# EAGLE board official (EAGLE 6.3)
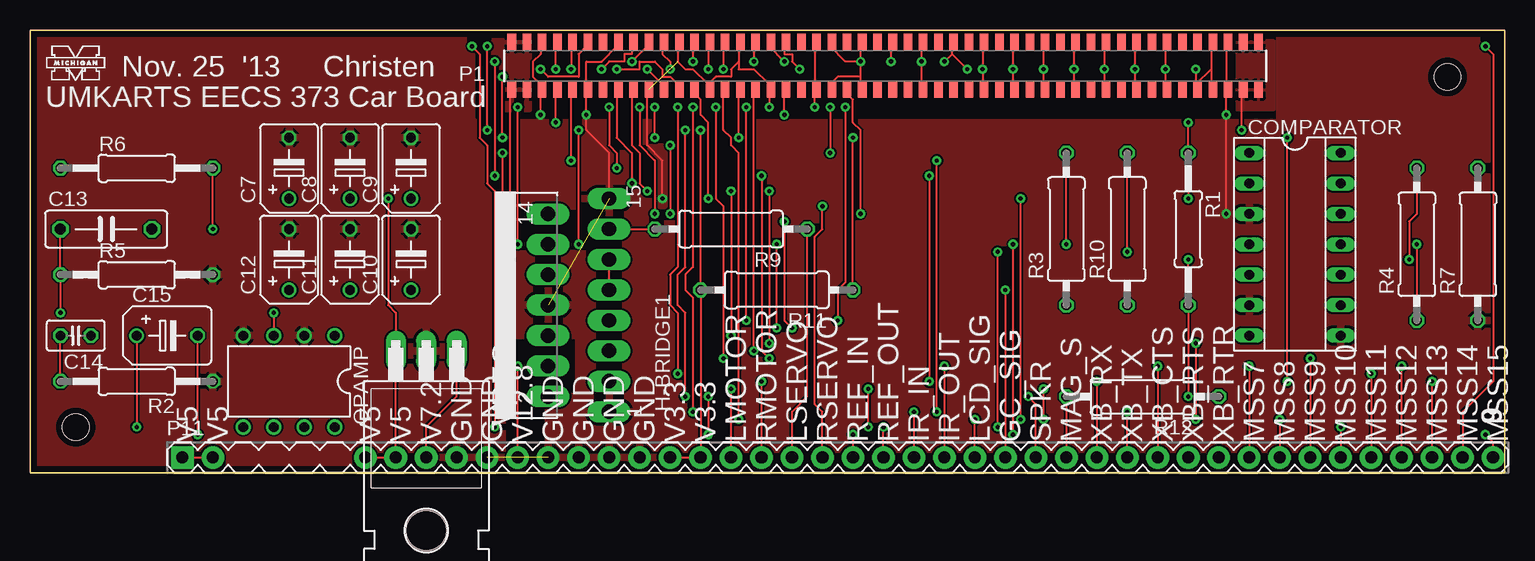
[diagram p0: board, top side]
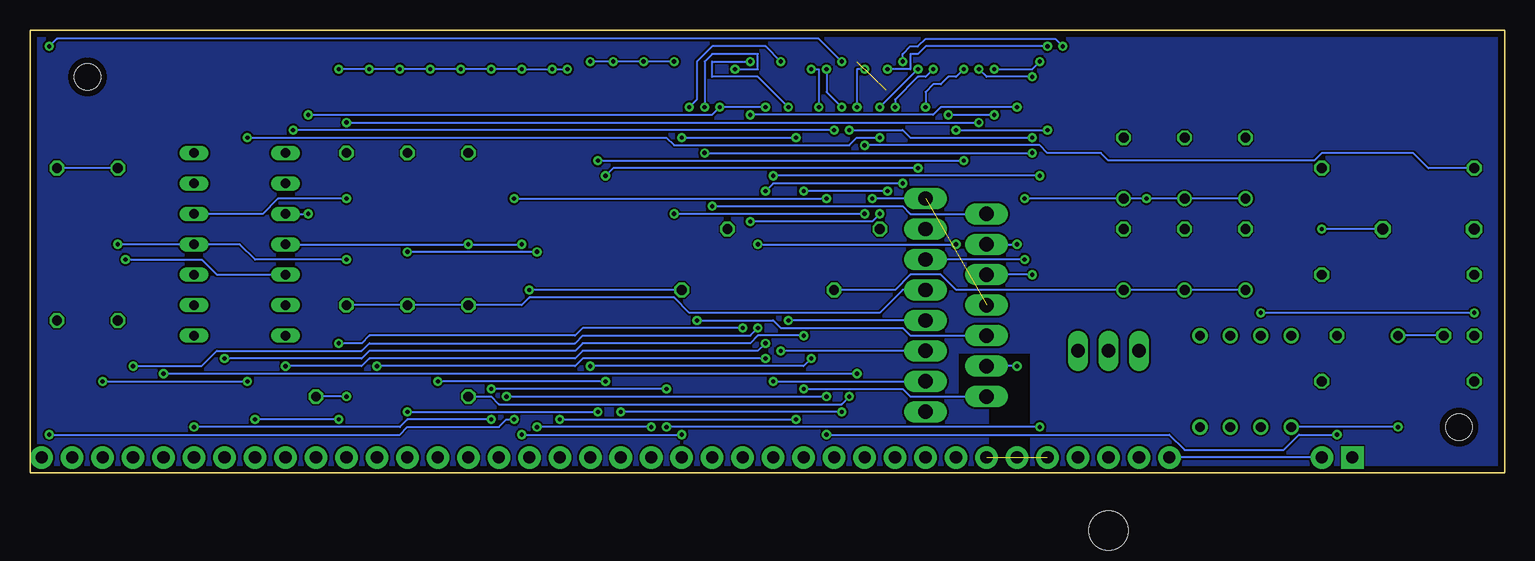
[diagram p1: board, bottom side, seen from below]

Size 122.89 x 36.93 mm. Coordinates in mm from the lower left corner, seen from the top.
Outline: 0,0 122.89,0 122.89,36.93 0,36.93 0,0
Copper layers (1*16): Top 0.0178mm / dielectric 59mil / Bottom 0.0178mm
Design rules "SSC-EAGLE-2Lyr_v1.0.0.3 *": minimum track width 6mil, minimum drill 14mil, track to track 6mil, track to pad 6mil, pad to pad 6mil, via to via 6mil, smd to smd 6mil, copper to edge 20mil, drill to drill 16mil, minimum pad ring 8mil, minimum via ring 8mil, stop-mask expansion 3mil, vias tented up to drill 16mil, thermal gap 10mil
Holes 2.2 mm at 3.81,3.81 118.11,33.02

## Footprints (pad centres in the part's own frame; a part is rotated, then mirrored left to right if it is on the bottom)
B45181B = drill 0.813: + -2.54,0 | drill 0.813 octagon: - 2.54,0
C075-032X103 = drill 0.914 octagon: 1 -3.81,0; 2 3.81,0
C025-025X050 = drill 0.813 octagon: 1 -1.27,0; 2 1.27,0
SOCKET-14 = drill 0.813 long: 1 -7.62,-3.81; 2 -5.08,-3.81; 3 -2.54,-3.81; 4 0,-3.81; 5 2.54,-3.81; 6 5.08,-3.81; 7 7.62,-3.81; 8 7.62,3.81; 9 5.08,3.81; 10 2.54,3.81; 11 0,3.81; 12 -2.54,3.81; 13 -5.08,3.81; 14 -7.62,3.81
MULTIWATT-15 = drill 1.2 long: 1 -8.89,-7.62; 2 -7.62,-2.54; 3 -6.35,-7.62; 4 -5.08,-2.54; 5 -3.81,-7.62; 6 -2.54,-2.54; 7 -1.27,-7.62; 8 0,-2.54; 9 1.27,-7.62; 10 2.54,-2.54; 11 3.81,-7.62; 12 5.08,-2.54; 13 6.35,-7.62; 14 7.62,-2.54; 15 8.89,-7.62
DIL08 = drill 0.813 pad 1.27: 1 -3.81,-3.81; 2 -1.27,-3.81; 3 1.27,-3.81; 4 3.81,-3.81; 5 3.81,3.81; 6 1.27,3.81; 7 -1.27,3.81; 8 -3.81,3.81
CLP-150 = smd 0.711 x 1.35: P$1 -31.115,1.99; P$2 -31.115,-1.99; P$3 -29.845,1.99; P$4 -29.845,-1.99; P$5 -28.575,1.99; P$6 -28.575,-1.99; P$7 -27.305,1.99; P$8 -27.305,-1.99; P$9 -26.035,1.99; P$10 -26.035,-1.99; P$11 -24.765,1.99; P$12 -24.765,-1.99; P$13 -23.495,1.99; P$14 -23.495,-1.99; P$15 -22.225,1.99; P$16 -22.225,-1.99; P$17 -20.955,1.99; P$18 -20.955,-1.99; P$19 -19.685,1.99; P$20 -19.685,-1.99; P$21 -18.415,1.99; P$22 -18.415,-1.99; P$23 -17.145,1.99; P$24 -17.145,-1.99; P$25 -15.875,1.99; P$26 -15.875,-1.99; P$27 -14.605,1.99; P$28 -14.605,-1.99; P$29 -13.335,1.99; P$30 -13.335,-1.99; P$31 -12.065,1.99; P$32 -12.065,-1.99; P$33 -10.795,1.99; P$34 -10.795,-1.99; P$35 -9.525,1.99; P$36 -9.525,-1.99; P$37 -8.255,1.99; P$38 -8.255,-1.99; P$39 -6.985,1.99; P$40 -6.985,-1.99; P$41 -5.715,1.99; P$42 -5.715,-1.99; P$43 -4.445,1.99; P$44 -4.445,-1.99; P$45 -3.175,1.99; P$46 -3.175,-1.99; P$47 -1.905,1.99; P$48 -1.905,-1.99; P$49 -0.635,1.99; P$50 -0.635,-1.99; P$51 0.635,1.99; P$52 0.635,-1.99; P$53 1.905,1.99; P$54 1.905,-1.99; P$55 3.175,1.99; P$56 3.175,-1.99; P$57 4.445,1.99; P$58 4.445,-1.99; P$59 5.715,1.99; P$60 5.715,-1.99; P$61 6.985,1.99; P$62 6.985,-1.99; P$63 8.255,1.99; P$64 8.255,-1.99; P$65 9.525,1.99; P$66 9.525,-1.99; P$67 10.795,1.99; P$68 10.795,-1.99; P$69 12.065,1.99; P$70 12.065,-1.99; P$71 13.335,1.99; P$72 13.335,-1.99; P$73 14.605,1.99; P$74 14.605,-1.99; P$75 15.875,1.99; P$76 15.875,-1.99; P$77 17.145,1.99; P$78 17.145,-1.99; P$79 18.415,1.99; P$80 18.415,-1.99; P$81 19.685,1.99; P$82 19.685,-1.99; P$83 20.955,1.99; P$84 20.955,-1.99; P$85 22.225,1.99; P$86 22.225,-1.99; P$87 23.495,1.99; P$88 23.495,-1.99; P$89 24.765,1.99; P$90 24.765,-1.99; P$91 26.035,1.99; P$92 26.035,-1.99; P$93 27.305,1.99; P$94 27.305,-1.99; P$95 28.575,1.99; P$96 28.575,-1.99; P$97 29.845,1.99; P$98 29.845,-1.99; P$99 31.115,1.99; P$100 31.115,-1.99
1X40 = drill 1.016 pad 1.88 square: 1 -54.61,0 | drill 1.016 pad 1.88: 2 -52.07,0; 3 -39.37,0; 4 -36.83,0; 5 -34.29,0; 6 -31.75,0; 7 -29.21,0; 8 -26.67,0; 9 -24.13,0; 10 -21.59,0; 11 -19.05,0; 12 -16.51,0; 13 -13.97,0; 14 -11.43,0; 15 -8.89,0; 16 -6.35,0; 17 -3.81,0; 18 -1.27,0; 19 1.27,0; 20 3.81,0; 21 6.35,0; 22 8.89,0; 23 11.43,0; 24 13.97,0; 25 16.51,0; 26 19.05,0; 27 21.59,0; 28 24.13,0; 29 26.67,0; 30 29.21,0; 31 31.75,0; 32 34.29,0; 33 36.83,0; 34 39.37,0; 35 41.91,0; 36 44.45,0; 37 46.99,0; 38 49.53,0; 39 52.07,0; 40 54.61,0
0207/12 = drill 0.813 octagon: 1 -6.35,0; 2 6.35,0
0309/12 = drill 0.813 octagon: 1 -6.35,0; 2 6.35,0
TO220H = drill 1.118 long: 1 -2.54,-10.16; 2 0,-10.16; 3 2.54,-10.16 | hole 3.302: 0,4.826

## Placement (x,y rotation side)
C7  [B45181B]  21.59,25.4 90 top
C8  [B45181B]  26.67,25.4 90 top
C9  [B45181B]  31.75,25.4 90 top
C10  [B45181B]  31.75,17.78 90 top
C11  [B45181B]  26.67,17.78 90 top
C12  [B45181B]  21.59,17.78 90 top
C13  [C075-032X103]  6.35,20.32 0 top
C14  [C025-025X050]  3.81,11.43 180 top
C15  [B45181B]  11.43,11.43 0 top
COMPARATOR  [SOCKET-14]  105.41,19.05 270 top
H-BRIDGE1  L298  [MULTIWATT-15]  40.64,13.97 90 top
OPAMP  LM386N-4  [DIL08]  21.59,7.62 180 top
P1  DEV_CLP-150  [CLP-150]  71.26,33.93 0 top
P11  DEV_1X40  [1X40]  67.31,1.27 0 top
R1  2.2K  [0207/12]  96.52,20.32 270 top
R2  [0207/12]  8.89,7.62 180 top
R3  10k  [0309/12]  86.36,20.32 90 top
R4  10K  [0309/12]  115.57,19.05 90 top
R5  [0207/12]  8.89,16.51 0 top
R6  [0207/12]  8.89,25.4 0 top
R7  2.2k  [0309/12]  120.65,19.05 90 top
R9  10  [0309/12]  58.42,20.32 180 top
R10  200  [0309/12]  91.44,20.32 90 top
R11  10k  [0309/12]  62.23,15.24 180 top
R12  750  [0309/12]  92.71,6.35 180 top
U$1  [UMICH]  1.27,32.51 0 top
VREG  7806T  [TO220H]  33.02,0 180 top

## Library data of the parts
C7-C15 R1-R7 R9-R12 = rcl
COMPARATOR = ic-package
H-BRIDGE1 = st-microelectronics; MPN: L298N; OC_FARNELL: 1589425; OC_NEWARK: 32M1527
OPAMP VREG = linear
P1 P11 = EECS370
U$1 = umich

## Nets
7.2V: P11.5 VREG.1
12.8V: H-BRIDGE1.4 P11.8
AC1: P1.P$91
AC2: P1.P$49
AC3: P1.P$53
AC4: P1.P$57
ADC0: P1.P$77
ADC1: P1.P$78
ADC4: P1.P$73
ADC5: P1.P$74
ADC6: P1.P$81
ADC7: P1.P$82
ADC8: P1.P$85
ADC9: P1.P$86
ADC10: P1.P$89
ADC11: P1.P$90
AGND: P1.P$43 P1.P$44 P1.P$47 P1.P$48 P1.P$51 P1.P$55 P1.P$56 P1.P$59 P1.P$63 P1.P$64 P1.P$67 P1.P$68 P1.P$71 P1.P$72 P1.P$75 P1.P$76 P1.P$79 P1.P$80 P1.P$83 P1.P$84 P1.P$87 P1.P$88 P1.P$92 P1.P$93 P1.P$94
AT2: P1.P$50
AT3: P1.P$54
AT4: P1.P$58
ATGND1: P1.P$52
ATGND2: P1.P$60
AV1_1: P1.P$61
AV1_3: P1.P$65
AV1_4: P1.P$70
AV2_1: P1.P$62
AV2_3: P1.P$66
AV2_4: P1.P$69
DACOUT0: P1.P$45
DACOUT1: P1.P$46 R6.1
DGND: C7.- C8.- C9.- C10.- C11.- C12.- COMPARATOR.3 COMPARATOR.6 COMPARATOR.8 H-BRIDGE1.1 H-BRIDGE1.8 H-BRIDGE1.15 OPAMP.2 OPAMP.4 P1.P$5 P1.P$6 P1.P$12 P1.P$15 P1.P$20 P1.P$23 P1.P$28 P1.P$31 P1.P$36 P1.P$41 P1.P$42 P1.P$95 P1.P$96 P11.6 P11.7 P11.9 P11.10 P11.11 P11.12 R2.1 R5.2 R7.1 VREG.2
F2-200-IO_0: P1.P$27 P11.21
F2-200-IO_1: P1.P$29 P11.22
F2-200-IO_2: P1.P$30 P11.23
F2-200-IO_3: P1.P$32 P11.24 R11.1
F2-200-IO_4: H-BRIDGE1.6 P1.P$33
F2-200-IO_5: H-BRIDGE1.5 P1.P$34
F2-200-IO_6: H-BRIDGE1.7 P1.P$35
F2-200-IO_7: H-BRIDGE1.10 P1.P$37
F2-200-IO_8: H-BRIDGE1.12 P1.P$38
LMOTOR: H-BRIDGE1.2 P11.15
LSERVO: P11.17 R9.1
MSS_GP_IO_0: P1.P$7 P11.26 R12.2
MSS_GP_IO_1: COMPARATOR.12 P1.P$8 R1.1
MSS_GP_IO_2: P1.P$9 P11.27
MSS_GP_IO_3: P1.P$10 P11.28
MSS_GP_IO_4: P1.P$11 P11.29
MSS_GP_IO_5: P1.P$13
MSS_GP_IO_6: P1.P$14
MSS_GP_IO_7: P1.P$16 P11.32
MSS_GP_IO_8: P1.P$17 P11.33
MSS_GP_IO_9: P1.P$18 P11.34
MSS_GP_IO_10: P1.P$19 P11.35
MSS_GP_IO_11: P1.P$21 P11.36
MSS_GP_IO_12: P1.P$22 P11.37
MSS_GP_IO_13: P1.P$24 P11.38
MSS_GP_IO_14: P1.P$25 P11.39
MSS_GP_IO_15: P1.P$26 P11.40
MSS_GPIO_5: P11.30
MSS_GPIO_6: P11.31
N$1: H-BRIDGE1.13 R9.2
N$2: C13.1 OPAMP.3 R5.1
N$3: COMPARATOR.5 R4.2 R7.2
N$4: C14.2 R2.2
N$5: C14.1 C15.+ OPAMP.5
N$6: OPAMP.6
N$9: C13.2 R6.2
PWM0: P1.P$39
PWM1: P1.P$40
REFS_IN: COMPARATOR.4 P11.19 R3.2
REFS_OUT: P11.20 R10.2
RMOTOR: H-BRIDGE1.3 P11.16
RSERVO: H-BRIDGE1.14 P11.18
SPKR: C15.- P11.25
VDD3.3: C10.+ C11.+ C12.+ P1.P$97 P1.P$98 P1.P$99 P1.P$100 P11.13 P11.14 R11.2
VDD5: C7.+ C8.+ C9.+ COMPARATOR.11 H-BRIDGE1.9 H-BRIDGE1.11 P1.P$1 P1.P$2 P1.P$3 P1.P$4 P11.1 P11.2 P11.3 P11.4 R1.2 R3.1 R4.1 R10.1 R12.1 VREG.3

## Tracks (layer width: path | path; a pad name or v marks a point on that pad's centre or on a via)
7.2V
  Top 0.152: VREG.1 35.56,6.35 33.02,3.81 P11.5
12.8V  (via drill 0.36)
  Top 0.152: P11.8 v40.64,8.89
  Bottom 0.152: v40.64,8.89 H-BRIDGE1.4
AGND  (via drill 0.36)
  Top 0.152: P1.P$55 74.3,35.56 v74.3,34.29 74.3,32.38 P1.P$56 | 69.22,33.02 67.31,33.02 66.67,32.38 P1.P$44 | 69.22,33.02 69.22,32.38 P1.P$48 | v69.22,34.29 67.94,34.29 66.67,35.56 P1.P$43 | 69.22,33.02 v69.22,34.29 | v69.22,34.29 69.22,35.56 P1.P$47 | v71.75,34.29 71.75,35.56 P1.P$51 | 76.83,34.92 76.83,35.56 P1.P$59 | v76.2,34.29 76.83,34.92 | 98.42,33.66 97.16,32.38 | 98.42,33.66 98.42,35.56 P1.P$93 | 98.42,33.66 98.42,32.38 P1.P$94 | P1.P$88 94.61,32.38 v94.61,33.66 94.61,35.56 P1.P$87 | P1.P$84 92.08,32.38 v92.08,33.66 92.08,35.56 P1.P$83 | P1.P$80 89.53,32.38 v89.53,33.66 89.53,35.56 P1.P$79 | P1.P$76 87,32.38 v87,33.66 87,35.56 P1.P$75 | P1.P$72 84.45,32.38 v84.45,33.66 84.45,35.56 P1.P$71 | P1.P$64 79.38,32.38 v79.38,33.66 79.38,35.56 P1.P$63 | P1.P$68 81.92,32.38 v81.92,33.66 81.92,35.56 P1.P$67 | v97.16,33.66 97.16,32.38 | 97.16,32.38 P1.P$92 | v78.11,33.66 76.83,34.92
  Bottom 0.152: v69.22,34.29 v71.75,34.29 v74.3,34.29 v76.2,34.29 | v97.16,33.66 v94.61,33.66 v92.08,33.66 v89.53,33.66 v87,33.66 v84.45,33.66 v81.92,33.66 v79.38,33.66 v78.11,33.66
D$8
  pour Bottom: 0,36.83 123.19,36.83 123.19,0 45.72,0 43.18,0 43.18,6.35 45.72,6.35 45.72,10.16 39.37,10.16 39.37,0 0,0
DACOUT1  (via drill 0.36)
  Top 0.152: v69.22,21.59 69.22,28.57 68.58,29.21 68.58,31.11 67.94,31.75 P1.P$46 | v53.34,27.3 v53.34,21.59
  Bottom 0.152: v53.34,21.59 v69.22,21.59 | v53.34,27.3 38.73,27.3 38.1,26.67 33.66,26.67 33.02,26.04 15.88,26.04 15.24,26.67 7.62,26.67 6.35,25.4 R6.1
DGND  (via drill 0.36)  (3 unrouted)
  Top 0.152: 56.52,32.38 55.24,33.66 54.61,33.66 53.98,34.29 53.98,35.56 P1.P$23 | P1.P$41 65.41,35.56 65.41,32.38 P1.P$42 65.41,31.75 v65.41,30.48 | 59.05,34.29 59.05,35.56 P1.P$31 | 59.05,34.29 59.05,33.66 60.33,33.66 61.59,32.38 P1.P$36 61.59,31.75 v61.59,30.48 | 56.52,32.38 57.15,33.02 58.42,33.02 58.42,33.66 59.05,34.29 | 56.52,32.38 P1.P$28 | P1.P$95 99.69,35.56 99.69,32.38 P1.P$96 99.69,31.75 v99.69,29.84 v99.69,21.59 | P1.P$5 42.55,35.56 42.55,34.92 41.91,34.29 41.91,33.02 42.55,32.38 P1.P$6 42.55,31.75 v42.55,29.84 | H-BRIDGE1.15 48.26,26.67 46.35,28.57 v46.35,29.84 46.35,31.75 P1.P$12 46.35,32.38 46.35,34.29 47.62,34.29 48.9,35.56 P1.P$15 | v52.7,22.86 52.7,26.04 51.44,27.3 51.44,31.75 P1.P$20
  Bottom 0.152: v61.59,30.48 v65.41,30.48 66.04,29.84 v99.69,29.84 | H-BRIDGE1.15 v52.7,22.86 | v46.35,29.84 v42.55,29.84 | COMPARATOR.3 v99.69,21.59
  pour Top: 36.83,36.83 0,36.83 0,0 39.37,0 39.37,11.43 45.72,11.43 45.72,6.35 43.18,6.35 43.18,0 45.72,0 123.19,0 123.19,36.83 104.14,36.83 104.14,29.21 36.83,29.21
F2-200-IO_0  (via drill 0.36)
  Top 0.152: v73.66,5.08 P11.21 | v55.24,5.08 55.24,14.61 54.61,15.24 54.61,16.51 55.24,17.14 v55.24,30.48 | v56.52,33.66 56.52,35.56 P1.P$27
  Bottom 0.152: v55.24,5.08 v73.66,5.08 | v55.24,30.48 56.52,31.75 v56.52,33.66
F2-200-IO_1  (via drill 0.36)
  Top 0.152: v76.2,8.89 P11.22 | v57.78,9.53 57.78,22.23 57.15,22.86 v57.15,30.48 | v57.78,33.66 57.78,35.56 P1.P$29
  Bottom 0.152: v76.2,8.89 58.42,8.89 v57.78,9.53 | v57.15,30.48 57.15,33.66 v57.78,33.66
F2-200-IO_2  (via drill 0.36)
  Top 0.152: v59.05,4.45 59.05,26.67 58.42,27.3 58.42,27.94 57.78,28.57 57.78,31.75 P1.P$30 | P11.23 v78.74,4.45
  Bottom 0.152: v78.74,4.45 v59.05,4.45
F2-200-IO_3  (via drill 0.36)
  Top 0.152: v59.05,27.94 59.05,31.75 P1.P$32 | R11.1 v68.58,27.94 | v81.28,15.24 P11.24
  Bottom 0.152: v68.58,27.94 v59.05,27.94 | R11.1 v81.28,15.24
F2-200-IO_4  (via drill 0.36)
  Top 0.152: v67.31,12.7 67.31,15.24 67.94,15.88 v67.94,30.48 | v60.33,34.29 60.33,35.56 P1.P$33
  Bottom 0.152: H-BRIDGE1.6 49.53,11.43 50.16,12.06 60.33,12.06 60.96,12.7 v67.31,12.7 | v67.94,30.48 67.31,31.11 67.31,34.29 66.04,35.56 61.59,35.56 v60.33,34.29
F2-200-IO_5  (via drill 0.36)
  Top 0.152: v60.33,10.16 60.33,31.75 P1.P$34
  Bottom 0.152: H-BRIDGE1.5 v60.33,10.16
F2-200-IO_6  (via drill 0.36)
  Top 0.152: v62.87,34.29 61.59,35.56 P1.P$35 | v59.69,12.7 v59.69,30.48
  Bottom 0.152: v62.87,34.29 66.04,34.29 66.04,33.02 62.23,33.02 v59.69,30.48 | H-BRIDGE1.7 v59.69,12.7
F2-200-IO_7  (via drill 0.36)
  Top 0.152: v39.37,26.67 v39.37,16.51 | v66.67,30.48 v66.67,26.67 | v64.14,33.66 63.5,34.29 63.5,34.92 62.87,34.92 62.87,35.56 P1.P$37
  Bottom 0.152: v39.37,16.51 H-BRIDGE1.10 | v66.67,26.67 v39.37,26.67 | v66.67,30.48 66.67,34.29 66.04,34.92 62.23,34.92 62.23,33.66 v64.14,33.66
F2-200-IO_8  (via drill 0.36)
  Top 0.152: v62.87,29.84 62.87,31.75 P1.P$38 | v40.64,19.05 v40.64,30.48
  Bottom 0.152: v62.87,29.84 47.62,29.84 46.99,30.48 v40.64,30.48 | H-BRIDGE1.12 v40.64,19.05
LMOTOR  (via drill 0.36)
  Top 0.152: P11.15 v58.42,6.99
  Bottom 0.152: H-BRIDGE1.2 49.53,6.35 50.16,6.99 v58.42,6.99
LSERVO
  Top 0.152: R9.1 64.77,6.35 63.5,5.08 P11.17
MSS_GP_IO_0  (via drill 0.36)
  Top 0.152: R12.2 P11.26 | v43.81,33.66 43.81,35.56 P1.P$7 | v39.37,27.94 v39.37,33.02 | v54.61,28.57 54.61,17.14 53.98,16.51 53.98,13.97 54.61,13.34 v54.61,6.35
  Bottom 0.152: v43.81,33.66 43.18,33.02 v39.37,33.02 | v39.37,27.94 49.53,27.94 50.16,28.57 v54.61,28.57 | v54.61,6.35 55.24,5.71 83.82,5.71 84.45,6.35 R12.2
MSS_GP_IO_1  (via drill 0.36)
  Top 0.152: v43.81,29.21 43.81,31.75 P1.P$8 | v96.52,29.21 R1.1 v96.52,22.86
  Bottom 0.152: v96.52,29.21 v43.81,29.21 | COMPARATOR.12 103.5,21.59 102.23,22.86 v96.52,22.86
MSS_GP_IO_2  (via drill 0.36)
  Top 0.152: v88.9,7.62 P11.27 | v74.93,24.77 v74.93,7.62 | v48.9,25.4 48.9,26.67 48.26,27.3 v48.26,30.48 | v45.09,33.66 45.09,35.56 P1.P$9
  Bottom 0.152: v74.93,7.62 v88.9,7.62 | v74.93,24.77 74.3,25.4 v48.9,25.4 | v48.26,30.48 48.26,31.75 47.62,32.38 46.99,32.38 46.35,33.02 45.72,33.02 v45.09,33.66
MSS_GP_IO_3  (via drill 0.36)
  Top 0.152: v45.09,26.04 45.09,31.75 P1.P$10 | v75.56,5.08 v75.56,26.04 | P11.28 v91.44,5.08
  Bottom 0.152: v75.56,26.04 v45.09,26.04 | v91.44,5.08 v75.56,5.08
MSS_GP_IO_4  (via drill 0.36)
  Top 0.152: v93.98,8.89 P11.29 | v61.59,9.53 60.96,10.16 v60.96,24.77 | v38.73,34.29 v38.73,24.77 | v42.55,33.66 43.18,33.02 45.72,33.02 45.72,34.92 46.35,35.56 P1.P$11
  Bottom 0.152: v93.98,8.89 77.47,8.89 76.83,9.53 v61.59,9.53 | v38.73,24.77 v60.96,24.77 | v38.73,34.29 39.37,33.66 v42.55,33.66
MSS_GP_IO_7  (via drill 0.36)
  Top 0.152: v101.6,8.89 P11.32 | v61.59,23.5 v61.59,10.79 | v50.16,24.13 50.16,26.67 48.9,27.94 48.9,31.75 P1.P$16
  Bottom 0.152: v101.6,8.89 95.25,8.89 94.61,9.53 77.47,9.53 76.83,10.16 62.23,10.16 v61.59,10.79 | v61.59,23.5 60.96,24.13 v50.16,24.13
MSS_GP_IO_8  (via drill 0.36)
  Top 0.152: v104.14,4.45 P11.33 | v97.16,10.79 v97.16,4.45 | v63.5,12.06 62.87,12.7 v62.87,20.95 | v52.07,21.59 52.07,26.04 50.8,27.3 v50.8,30.48 | v47.62,33.66 48.26,34.29 49.53,34.29 49.53,34.92 50.16,34.92 50.16,35.56 P1.P$17
  Bottom 0.152: v97.16,4.45 v104.14,4.45 | v97.16,10.79 95.25,10.79 94.61,11.43 77.47,11.43 76.83,12.06 v63.5,12.06 | v62.87,20.95 52.7,20.95 v52.07,21.59 | v50.8,30.48 50.8,31.11 48.9,33.02 48.26,33.02 v47.62,33.66
MSS_GP_IO_9  (via drill 0.36)
  Top 0.152: v106.68,9.53 P11.34 | v58.42,23.5 v58.42,11.43 | v51.44,23.5 50.8,24.13 50.8,26.67 50.16,27.3 50.16,31.75 P1.P$18
  Bottom 0.152: v106.68,9.53 95.25,9.53 94.61,10.16 77.47,10.16 76.83,10.79 62.87,10.79 62.23,11.43 v58.42,11.43 | v51.44,23.5 v58.42,23.5
MSS_GP_IO_10  (via drill 0.36)
  Top 0.152: v109.22,3.81 P11.35 | v84.45,6.99 v84.45,4.45 | v69.85,3.81 v69.85,6.99 | v38.73,3.81 38.73,23.5 38.1,24.13 38.1,27.3 37.47,27.94 37.47,34.92 v36.83,35.56 | v50.16,34.29 51.44,35.56 P1.P$19
  Bottom 0.152: v109.22,3.81 92.08,3.81 91.44,4.45 v84.45,4.45 | v69.85,6.99 v84.45,6.99 | v38.73,3.81 v69.85,3.81 | v36.83,35.56 37.47,36.2 48.26,36.2 48.9,35.56 49.53,35.56 50.16,34.92 v50.16,34.29
MSS_GP_IO_11  (via drill 0.36)
  Top 0.152: v111.76,8.26 P11.36 | v53.98,8.26 53.98,13.34 53.34,13.97 53.34,16.51 53.98,17.14 v53.98,30.48 | v53.34,33.66 53.34,34.29 52.7,34.92 52.7,35.56 P1.P$21
  Bottom 0.152: v53.98,8.26 v111.76,8.26 | v53.98,30.48 53.98,33.66 v53.34,33.66
MSS_GP_IO_12  (via drill 0.36)
  Top 0.152: v51.44,33.66 52.7,32.38 P1.P$22 | v38.1,28.57 v38.1,35.56 | v45.72,19.05 v45.72,28.57 | v62.23,12.06 v62.23,19.05 | P11.37 v114.3,8.89
  Bottom 0.152: v51.44,33.66 49.53,33.66 49.53,34.92 48.9,34.92 48.26,35.56 v38.1,35.56 | v45.72,28.57 v38.1,28.57 | v62.23,19.05 v45.72,19.05 | v62.23,12.06 62.87,11.43 76.83,11.43 77.47,10.79 94.61,10.79 95.25,10.16 107.31,10.16 108.58,8.89 v114.3,8.89
MSS_GP_IO_13  (via drill 0.36)
  Top 0.152: v48.9,33.66 50.8,33.66 50.8,34.29 52.07,34.29 52.7,33.66 52.7,33.02 53.34,33.02 53.98,32.38 P1.P$24 | v52.07,27.94 v52.07,30.48 | v104.78,7.62 v104.78,27.94 | P11.38 v116.84,7.62
  Bottom 0.152: v52.07,30.48 v48.9,33.66 | v52.07,27.94 53.98,27.94 54.61,27.3 69.22,27.3 69.85,27.94 v104.78,27.94 | v116.84,7.62 v104.78,7.62
MSS_GP_IO_14  (via drill 0.36)
  Top 0.152: P11.39 119.38,5.08 121.92,7.62 121.92,34.92 v121.28,35.56 | v55.24,34.29 55.24,35.56 P1.P$25
  Bottom 0.152: v121.28,35.56 120.65,36.2 57.15,36.2 v55.24,34.29
MSS_GP_IO_15  (via drill 0.36)
  Top 0.152: v56.52,22.86 56.52,29.21 55.88,29.84 55.88,31.11 55.24,31.75 P1.P$26 | v82.55,4.45 v82.55,22.86 | v121.28,3.17 121.92,2.54 P11.40
  Bottom 0.152: v82.55,22.86 v56.52,22.86 | v82.55,4.45 83.19,4.45 83.82,3.81 91.44,3.81 92.08,3.17 v121.28,3.17
N$1
  Top 0.152: H-BRIDGE1.13 R9.2
N$2  (via drill 0.36)
  Top 0.152: C13.1 R5.1 v2.54,13.34 | v20.32,13.34 OPAMP.3
  Bottom 0.152: v2.54,13.34 v20.32,13.34
N$3  (via drill 0.36)
  Top 0.152: v114.94,17.78 114.94,20.95 115.57,21.59 R4.2
  Bottom 0.152: R4.2 R7.2 | COMPARATOR.5 107.31,16.51 108.58,17.78 v114.94,17.78
N$4
  Top 0.152: R2.2 C14.2
N$5  (via drill 0.36)
  Top 0.152: C15.+ v8.89,3.81
  Bottom 0.152: C14.1 C15.+ | v8.89,3.81 OPAMP.5
N$9  (via drill 0.36)
  Top 0.152: v15.24,20.32 R6.2
  Bottom 0.152: C13.2 v15.24,20.32
REFS_IN  (via drill 0.36)
  Top 0.152: v86.36,19.05 R3.2 | v68.58,3.17 P11.19 | v81.92,19.05 v81.92,3.17
  Bottom 0.152: COMPARATOR.4 v86.36,19.05 v81.92,19.05 | v81.92,3.17 v68.58,3.17
REFS_OUT  (via drill 0.36)
  Top 0.152: v91.44,18.41 R10.2 | v80.64,3.81 v80.64,18.41 | P11.20 v71.12,3.81
  Bottom 0.152: v80.64,18.41 v91.44,18.41 | v71.12,3.81 v80.64,3.81
RMOTOR  (via drill 0.36)
  Top 0.152: P11.16 v60.96,7.62
  Bottom 0.152: v60.96,7.62 H-BRIDGE1.3
RSERVO  (via drill 0.36)
  Top 0.152: v66.04,22.23 66.04,20.32 65.41,19.68 65.41,5.71 66.04,5.08 P11.18
  Bottom 0.152: H-BRIDGE1.14 49.53,21.59 50.16,22.23 v66.04,22.23
SPKR  (via drill 0.36)
  Top 0.152: v13.97,3.17 C15.- | v56.52,6.35 v56.52,3.17 | v83.19,6.35 83.82,5.71 P11.25
  Bottom 0.152: v13.97,3.17 17.14,3.17 18.41,1.91 26.67,1.91 27.94,3.17 v56.52,3.17 | v83.19,6.35 v56.52,6.35
VDD3.3  (via drill 0.36)
  Top 0.152: P11.13 P11.14 R11.2 v55.88,28.57 | v100.97,28.57 100.97,31.75 P1.P$98
  Bottom 0.152: C12.+ C11.+ C10.+ 45.72,15.24 46.99,16.51 49.53,16.51 50.8,15.24 R11.2 | v55.88,28.57 v100.97,28.57
  pour Top: 100.58,36.07 103.63,36.07 103.63,30.23 100.58,30.23
VDD5  (via drill 0.36)
  Top 0.152: v115.57,19.05 R4.1 | v96.52,6.35 R1.2 v96.52,17.78 | P11.1 P11.2 | P11.3 P11.4 VREG.3 30.48,13.34 29.84,13.97 v29.84,22.86 | H-BRIDGE1.9 H-BRIDGE1.11 | P1.P$2 40.01,31.75 v40.01,22.86 v40.01,17.78
  Bottom 0.152: v115.57,19.05 COMPARATOR.11 105.41,19.05 104.14,17.78 v96.52,17.78 | R1.2 R10.1 R3.1 81.92,13.97 81.28,14.61 69.22,14.61 67.94,13.34 52.07,13.34 50.16,15.24 H-BRIDGE1.9 | v96.52,6.35 R12.1 | P11.2 P11.3 | C7.+ C8.+ v29.84,22.86 C9.+ v40.01,22.86 | v40.01,17.78 H-BRIDGE1.11
  pour Top: 37.59,36.07 37.59,30.23 41.66,30.23 41.66,36.07

## Text on the board
tPlace: 9
tNames: Nov. 25 '13 Christen | UMKARTS EECS 373 Car Board | V5 | V5 | V5 | V5 | V7.2 | GND | GND | V12.8 | GND | GND | GND | GND | V3.3 | V3.3 | LMOTOR | RMOTOR | LSERVO | RSERVO | REF_IN | REF_OUT | IR_IN | IR_OUT | LCD_SIG | GC_SIG | SPKR | MAG_S | XB_RX | XB_TX | XB_CTS | XB_RTS | XB_RTR | MSS7 | MSS8 | MSS9 | MSS10 | MSS11 | MSS12 | MSS13 | MSS14 | MSS15